# Altium PCB esp8266_relay.PcbDoc
Units mil, origin at the board's own origin, x right, y up, seen from the top; angles counter-clockwise.
Board outline 2086.61 x 1338.58 mil, 2 copper layers (Top Layer, Bottom Layer); 25 components, 31 nets, 82 pads, 7 vias.
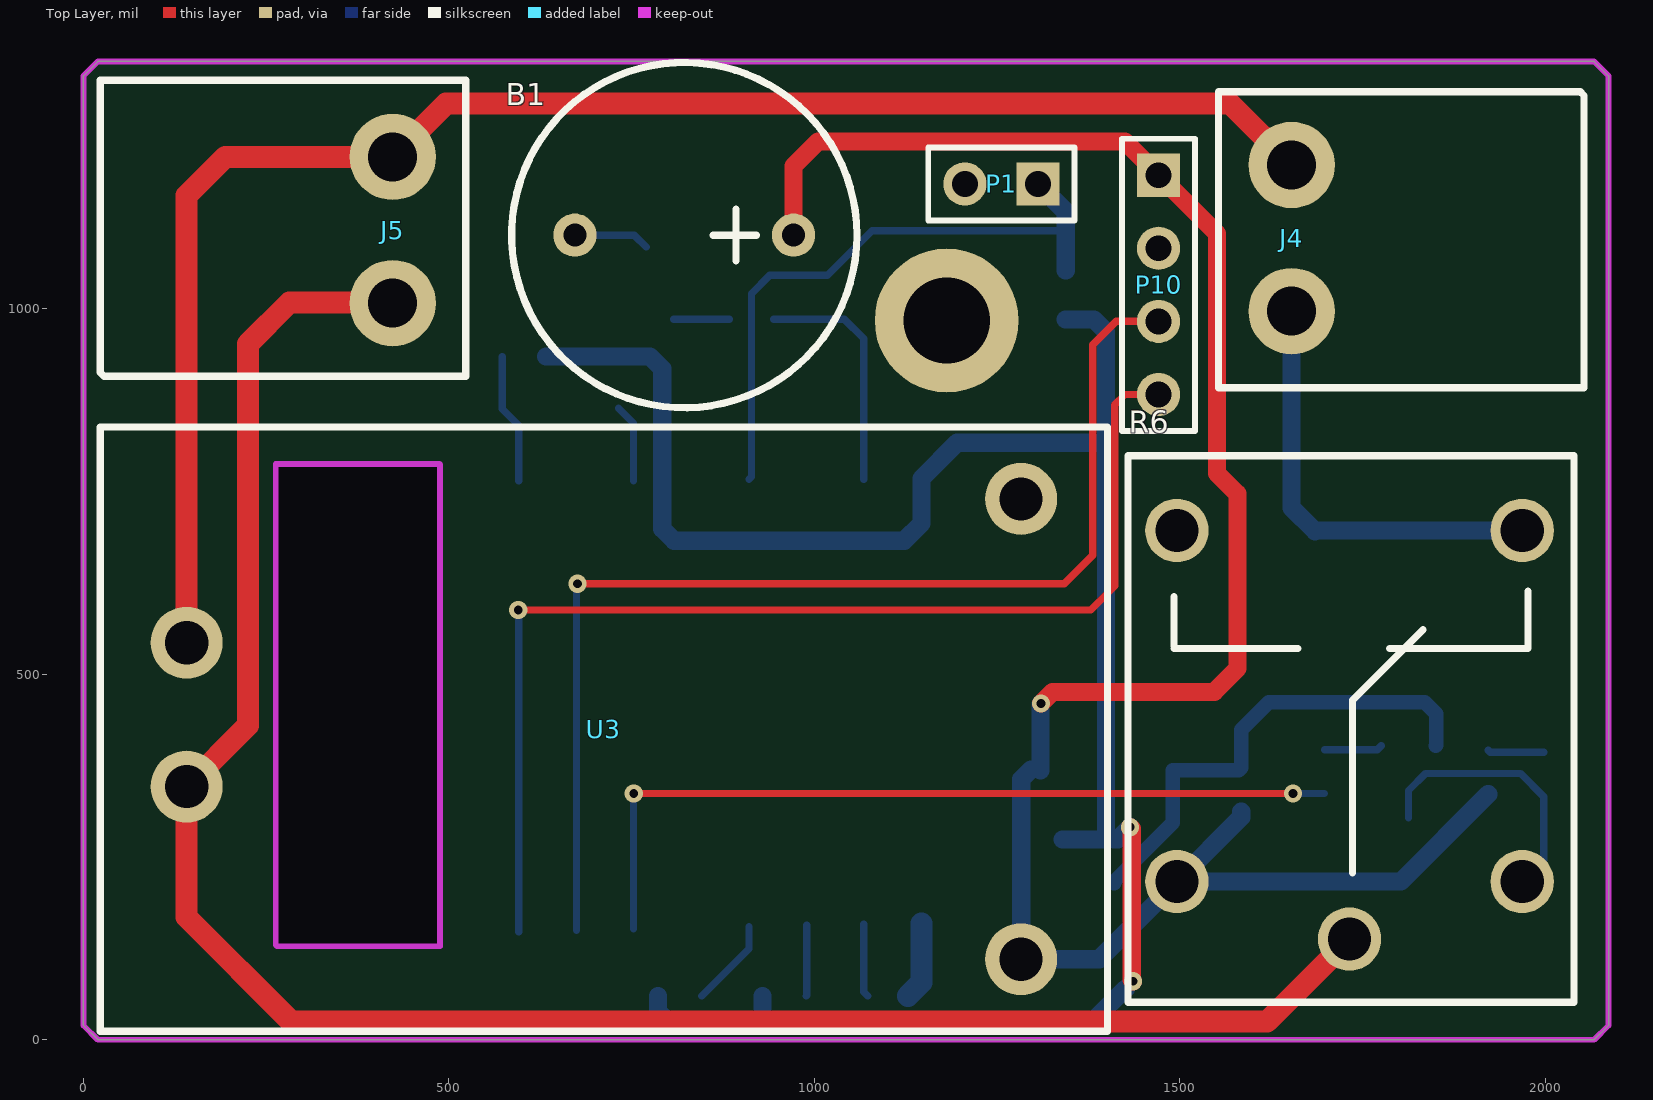
[diagram p0: Top Layer view]
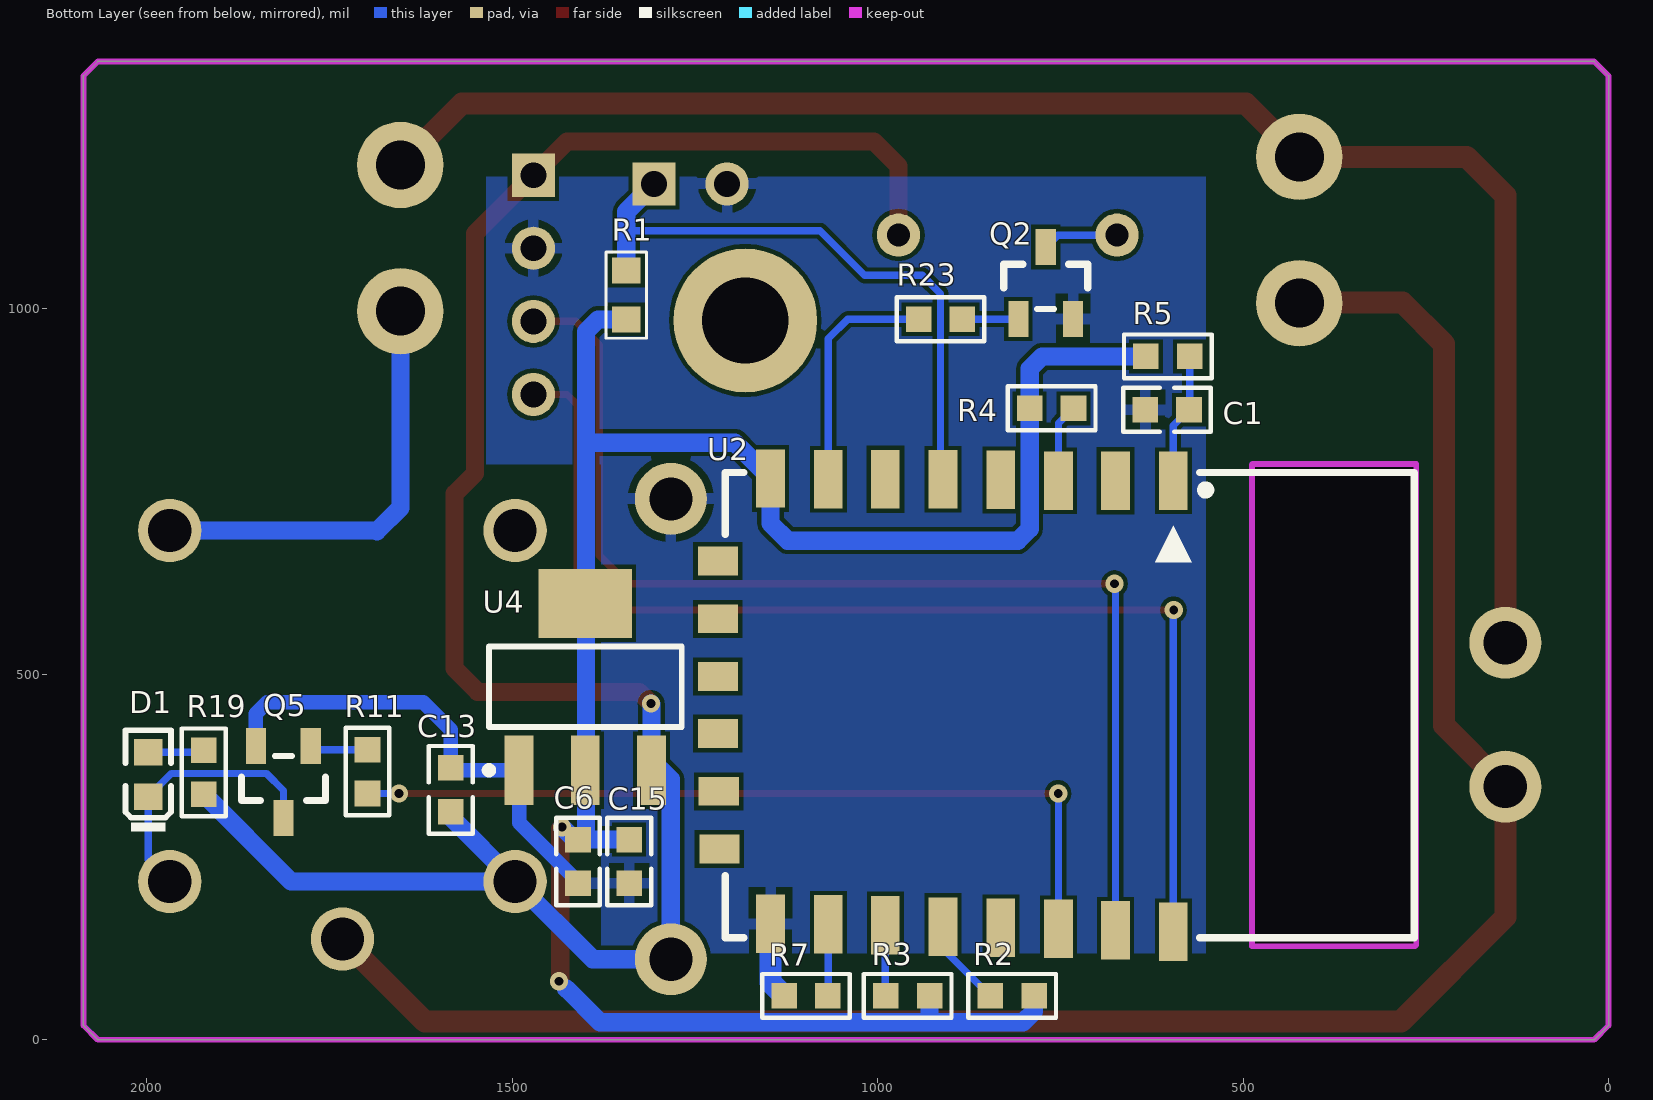
[diagram p1: Bottom Layer view, seen from below]

## Layer stack, top to bottom
Top Solder: solder mask 0.4, Solder Resist, Dk 3.5
Top Layer: signal copper 1.4
Dielectric 1: dielectric 12.6, FR-4, Dk 4.8
Bottom Layer: signal copper 1.4
Bottom Solder: solder mask 0.4, Solder Resist, Dk 3.5

## Board outline
0,19.68 19.68,0 2066.93,0 2086.61,19.68 2086.61,1318.9 2066.93,1338.58 19.68,1338.58 0,1318.9
cut-out: 263,130 265,128 488,128 488,787 487,788 263,788

## Design rules (kind name [scope] priority, off if disabled: settings)
Clearance [All] p1: gap=6
DiffPairsRouting [All] p1: maxlimit=100 minlimit=1 mostfreqgap=10 toplayer_minwidth=1 toplayer_maxwidth=15 toplayer_prefwidth=8 bottomlayer_minwidth=1 bottomlayer_maxwidth=15 bottomlayer_prefwidth=8 maxuncoupledlength=500
MinimumSolderMaskSliver SilkscreenOverComponentPads [All] p2: minsoldermaskwidth=10
PolygonConnect PolygonConnect_1 [isvia] p1: connectstyle=Direct reliefconductorwidth=10 reliefentries=4 polygonreliefangle="90 Angle" airgapwidth=10
PolygonConnect [All] p2: connectstyle=Relief reliefconductorwidth=15 reliefentries=4 polygonreliefangle="90 Angle" airgapwidth=10
RoutingVias [All] p1: holewidth=10 width=20 viastyle="Through Hole" minholewidth=8 minwidth=15 maxholewidth=50 maxwidth=100
SolderMaskExpansion [All] p1: expansion=4
Width [All] p1: maxlimit=30 minlimit=6 preferedwidth=10
28 further rules are at their usual default settings.

## Components (designator, comment, footprint, x,y, rotation, side; value= is the part's Value field where it differs from the comment)
B1 "Beel" BEEL 822,1101 r180 top
C1 "100nF" C0603 604,862 r0 bottom
C6 "0.1u" C0603 1410,244 r90 bottom
C13 "0.1u" C0603 1584,342 r270 bottom
C15 "10u" C0603 1340,244 r90 bottom
D1 "红灯 0603" 0603_LED_S1 1998,363 r90 bottom
J4 "CON2" CON_5.08_2 1653,997 r90 top
J5 "CON2" CON_5.08_2 423,1208 r270 top
P1 "Header 2" HDR1X2 1306,1171 r180 top
P10 "Header 4" HDR1X4 1471,1183 r270 top
Q2 "SS8050 Y1" SOT-23(SOT-23-3) 770.05,1035.53 r270 bottom
Q5 "SS8050 Y1" SOT-23(SOT-23-3) 1813,353 r90 bottom
R1 "12k" Res_0603 1344,1019 r270 bottom
R2 "12k" R0603 816,60 r0 bottom
R3 "12k" R0603 959,60 r0 bottom
R4 "12k" R0603 762,864 r180 bottom
R5 "12k" R0603 603,935 r180 bottom
R6 "Relay" HF3FF-JQC-3FF-005 1732.28,137.8 r90 top
R7 "12k" R0603 1098,60 r180 bottom
R11 "1k" R0603 1698,367 r90 bottom
R19 "1k" R0603 1922,366 r270 bottom
R23 "1k" R0603 914,986 r0 bottom
U2 "ESP_12_E" ESP8266 907,458 r270 bottom
U3 "HLK_PM01-5v" HLK_PM01-5v 968,563 r0 top
U4 "AMS1117-3.3" AMS1117 1400,483 r90 bottom

## Footprints (in the part's own frame and the unit in brackets; to place one, negate y for a bottom-side part, rotate by r counter-clockwise, add the part's x,y. Pads: shape width x height; smd on the part's side, far side on the other; paste and mask are expansions set on the pad)
0603_LED_S1 [mm]
  rect 0.93x0.98 smd: A(0.77,0) K(-0.77,0)
  silkscreen extent -1.98,-0.79 1.54,0.79, body extent -0.8,-0.4 0.8,0.4, height 0.6
AMS1117 [mm] "SOT223, 4-Leads, Body 6.50x7.00mm (avg), Pitch 2.30mm, IPC Medium Density"
  rect 2.4x1 smd: 1(-2.9,2.3) 2(-2.9,0) 3(-2.9,-2.3)
  rect 2.4x3.25 smd: 2(2.9,0)
  silkscreen extent -3.02,-3.35 1.4,3.48, body extent -1.85,-3.35 1.85,3.35, height 1.8
BEEL [mm]
  round 1.5 hole 0.8: 1(-3.8,0) 2(3.8,0)
  silkscreen extent -6,-6 6,6, body extent -9.53,-6 5.93,6, height 9.65
C0603 [mil]
  rect 35x35 smd: 1(-30,0) 2(30,0)
  silkscreen extent -60,-30 60,30
CON_5.08_2 [mm]
  round 3 hole 1.7: 1(0,0) 2(5.08,0)
  silkscreen extent -2.67,-10.16 7.62,2.54
ESP8266 [mil]
  rect 80x39.37 smd: 1(-307,311.5) 2(-307,232.5) 3(-307,154.5) 4(-308,75.5) 5(-309,-3.5) 6(-309,-82.5) 7(-309,-160.5) 8(-310,-239.5) 15(299,-239.5) 16(300,-160.5) 17(301,-82.5) 18(303,-3.5) 19(305,75.5) 20(306,154.5) 21(308,232.5) 22(310,311.5)
  rect 39.37x55 smd: 9(-197,-311.5) 10(-118,-311.5) 11(-39,-311.5) 12(39,-311.5) 13(118,-310.5) 14(197,-309.5)
  silkscreen extent -318,-301 318,641, body extent -315,-298 315,646, height 108
HDR1X2 [mm] "Connector; Header; 2 Position"
  rect 1.5x1.5 hole 0.9: 1(0,0)
  round 1.5 hole 0.9: 2(2.54,0)
  silkscreen extent -1.27,-1.27 3.81,1.27
HDR1X4 [mm] "Connector; Header; 4 Position"
  rect 1.5x1.5 hole 0.9: 1(0,0)
  round 1.5 hole 0.9: 2(2.54,0) 3(5.08,0) 4(7.62,0)
  silkscreen extent -1.27,-1.27 8.89,1.27
HF3FF-JQC-3FF-005 [mm]
  round 2.2 hole 1.5: 1(0,0) 2(14.2,6) 3(14.2,-6) 4(2,6) 5(2,-6)
  silkscreen extent -2.2,-7.8 16.8,7.7
HLK_PM01-5v [mm]
  round 2.5 hole 1.5: 1(-21,-0.5) 2(-21,-5.5) 3(8,-11.5) 4(8,4.5)
  silkscreen extent -24,-14 11,7
R0603 [mil]
  rect 35x35 smd: 1(-30,0) 2(30,0)
  silkscreen extent -60,-30 60,30
Res_0603 [mm]
  rect 0.9x1 smd: 1(-0.85,0) 2(0.85,0)
  silkscreen extent -1.5,-0.7 1.5,0.7, body extent -0.8,-0.4 0.8,0.4, height 0.3
SOT-23(SOT-23-3) [mm]
  rect 1.25x0.7 smd: 1(1.25,-0.95) 2(1.25,0.95) 3(-1.25,0)
  silkscreen extent -0.65,-1.46 0.9,1.46, body extent -1.5,-1.5 1.5,1.5, height 1.3

## Part data
C1: library part SMT_C_0402, "Surface mount capacitor 0402"
C6 C13 C15: library part Cap_0402
D1: library part "0603 红灯", "发光二极管"
J4 J5: "Connector"
P1: "Header, 2-Pin"
P10: "Header, 4-Pin"
Q2 Q5: library part "SOT-23 SS8050 Y1", "三极管"
R1: library part Res_0603
R2 R3 R4 R5 R7: library part SMT_R_0402, "Surface mount resistor 0402"
R11 R19 R23: library part Res_0402
U2: "ESP-12 Wi-Fi Module by AI-Thinker"
U4: library part AMS1117

## Free pads (board coordinates)
  round 196.85 hole 118.11: 0(1181.1,984.25)

## Via types
v1: diameter 25, hole 12, Top Layer to Bottom Layer, 7 vias

## Nets (pads, with @x,y where several pads share a name; then routed paths per layer and width w, separated by ;. In a path a pad name is that pad's centre, name@x,y a point inside that pad or via, vN(x,y) a via of type N, cw(c..) or ccw(c..) an arc to the next point about the centre after c; other vN are vias at no path point)
ADC: U2.2
EN: R4.2 U2.3 | length 107.5
  Bottom Layer w10: R4.2 752.5,843.5 U2.3
GND: C1.2 C6.1 C13.1 C15.1 P1.2 P10.2 Q2.2 Q5.2 R7.1 U2.15 U3.4 U4.1 | length 775
  Bottom Layer w20: C6.1 1410,216.37 1490.55,296.92 U4.1 1580.83,368.83 C13.1 1584,424 1622,462 1835,462 1851,446 1851,402.81 Q5.2
  Bottom Layer w30: R7.1 1146.5,78.5 U2.15
GPIO0: R2.2 U2.18 | length 121.7
  Bottom Layer w10: R2.2 910.5,124.5 U2.18
GPIO2: R3.2 U2.17 | length 97.2
  Bottom Layer w10: R3.2 989.5,60.5 U2.17
GPIO4: U2.19
GPIO5: R11.1 U2.20 | length 1130
  Top Layer w10: v1(753,337) v1(1655,337)
  Bottom Layer w10: U2.20 v1@752.5,337 ; v1(1655,337) R11.1
GPIO9: U2.11
GPIO10: U2.12
GPIO12: U2.6
GPIO13: R23.2 U2.7 | length 327
  Bottom Layer w10: R23.2 1041,986 1067.5,959.5 U2.7
GPIO14: P1.1 R1.1 U2.5 | length 856.6
  Bottom Layer w10: U2.5 914,770.5 914,1021 939,1046 1018,1046 1079,1107 1341,1107 1344,1104
  Bottom Layer w25: P1.1 1344,1133 1344,1104 R1.1
GPIO15: R7.2 U2.16 | length 100.3
  Bottom Layer w10: U2.16 1067.5,65.5 R7.2@1073,60
GPIO16: U2.4
L~: J5.2 R6.1 U3.2 | length 2737.9
  Top Layer w30: J5.2 422,1009 282,1009 225,952 225,430.24 U3.2 141.23,167.77 284,25 1619.49,25 R6.1
NetB1_2: B1.2 Q2.3 | length 104.4
  Bottom Layer w10: B1.2 753.79,1101 Q2.3
NetD1_A: D1.A R19.1 | length 77.1
  Bottom Layer w10: R19.1 1924.68,393.32 D1.A
NetD1_K: D1.K Q5.3 R6.5 | length 373.5
  Bottom Layer w10: Q5.3 1813,341 1836.5,364.5 1966.19,364.5 D1.K 1998,246.03 R6.5
NetJ4_1: J4.1 R6.3 | length 598.1
  Bottom Layer w25: J4.1 1653,728 1685,696 1685.85,696.85 R6.3
NetQ2_1: Q2.1 R23.1 | length 76.7
  Bottom Layer w10: Q2.1 807.76,986 R23.1
NetQ5_1: Q5.1 R11.2 | length 79.8
  Bottom Layer w10: R11.2 1770.39,397 Q5.1
NRST: C1.1 R5.2 U2.1 | length 179.3
  Bottom Layer w10: R5.2 573,863 C1.1 595.5,840.5 U2.1
N~: J4.2 J5.1 U3.1 | length 2210.6
  Top Layer w30: U3.1 141.23,1155.23 194,1208 J5.1 496,1281 1569,1281 J4.2
RXD0: P10.3 U2.21 | length 1587
  Top Layer w10: v1(676,624) 1342,624 1381,663 1381,951 1413,983 P10.3
  Bottom Layer w10: U2.21 674.5,622.5 v1(676,624)
SPI_CLK: U2.14
SPI_INT: U2.13
SPI_MISO: U2.10
SPI_MOSI: U2.9
TXD0: P10.4 U2.22 | length 1583.7
  Top Layer w10: v1(595,588) 1378,588 1411,621 1411,869 1425,883 P10.4
  Bottom Layer w10: v1(595,588) 595.5,587.5 U2.22
VCC5V: B1.1 C13.2 P10.1 R6.4 R19.2 U3.3 U4.3 | length 2856.5
  Top Layer w25: B1.1 971.61,1195.61 1005,1229 1425,1229 P10.1 1551,1103 1551,775 1579,747 1579,508 1547,476 1326,476 v1(1310,460)
  Bottom Layer w25: U4.3@1296.45,369.83 1282.96,356.34 U3.3 1389.77,110.24 R6.4 ; U4.3 1309.45,459.45 v1(1310,460) ; C13.2 1584,304.47 R6.4 ; R19.2 1802.54,216.54 R6.4
VDD3V3: C6.2 C15.2 R1.2 R2.1 R3.1 R4.1 R5.1 U2.8 U4.2 | length 2871.7
  Top Layer w25: v1(1432,291) 1434.26,288.74 1434.26,81.74 v1(1436,80)
  Bottom Layer w25: R5.1 775,935 792,918 R4.1 792,699 808,683 1123,683 1146.5,706.5 U2.8 1195.5,817 1399,817 ; R2.1 786,39 801,24 933,24 ; R3.1 929,28 933,24 ; C15.2 1399,274 1399,817 ; R1.2 1382.46,985.54 1399,969 1399,817 ; C6.2 1415,274 v1(1432,291) ; 1426,70 1380,24 933,24
pads on no net: R6.2

## Polygon pours and split planes (outlines as drawn)
GND on Bottom Layer "Top Layer-No Net" (solid, remove dead copper, pour order 2): 551.18,1181.1 1535.43,1181.1 1535.43,787.4 1377.95,787.4 1377.95,118.11 551.18,118.11

## Keep-outs
Keep-Out Layer:
  lines w8: 0,19.68 19.68,0 2066.93,0 2086.61,19.68 2086.61,1318.9 2066.93,1338.58 19.68,1338.58 0,1318.9 0,19.68 ; 263,130 263,788 487,788 488,787 488,128 265,128 263,130

## Text inside footprints (layer, text, board x,y; h text height)
U2: Mechanical 13 "ANTENNA AREA" at 287.5,714 h10 r90; Mechanical 13 "CUTOUT POLYGON" at 307.5,714 h10 r90